# Altium PCB RF_PCB-v2.PcbDoc (part 2 of 2)
Units mm, origin at the board's own origin, x right, y up, seen from the top; angles counter-clockwise.
Board outline 99.5 x 79.5 mm, 2 copper layers (Top Layer, Bottom Layer); 69 components, 53 nets, 337 pads, 75 vias.
Unrouted connection lines stored in the file: 1.
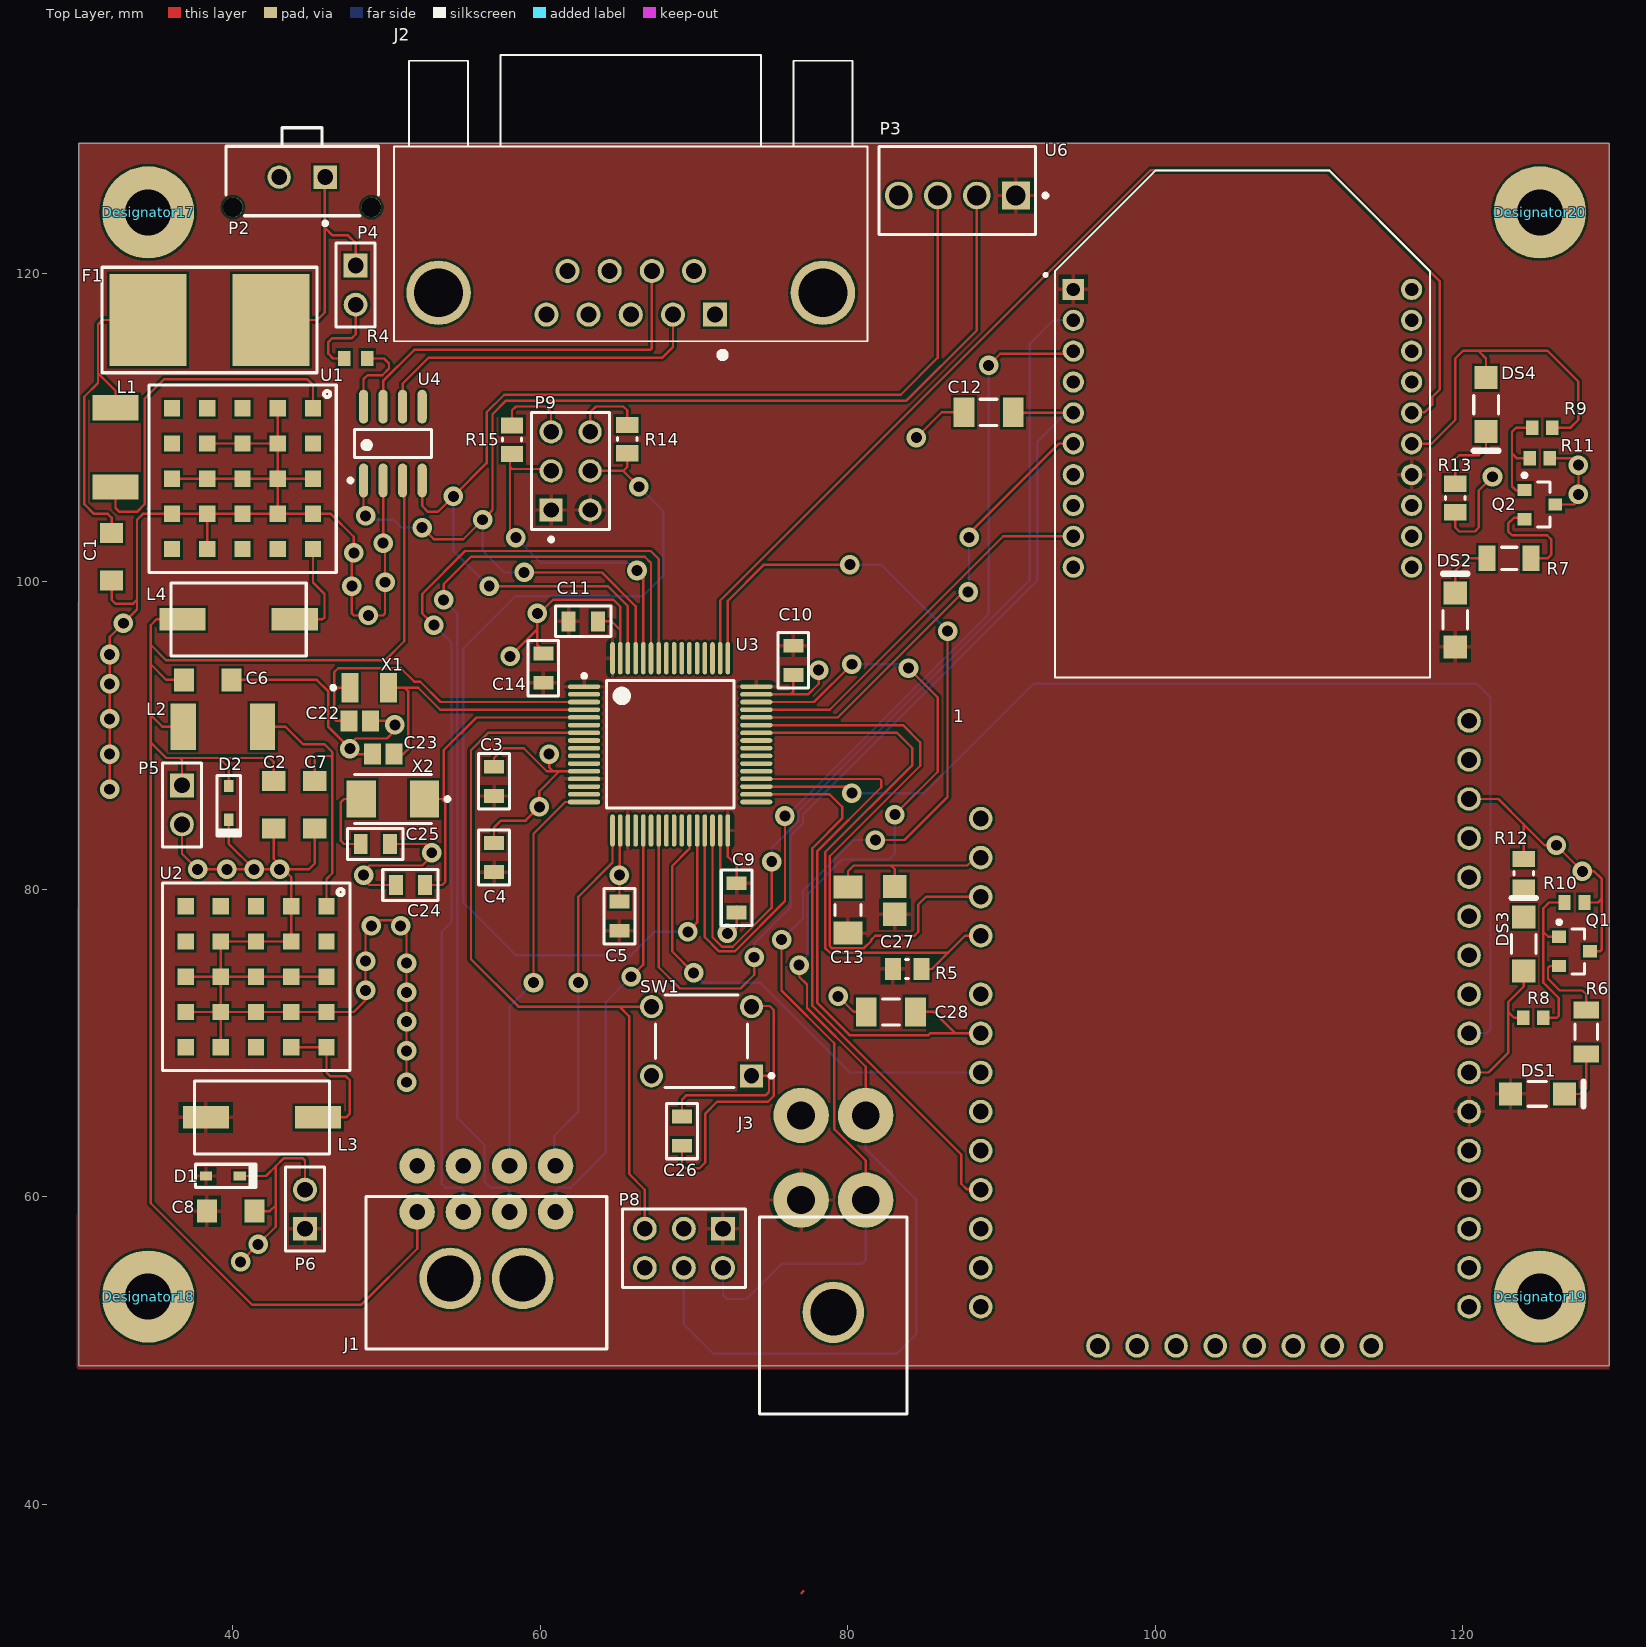
[diagram p0: Top Layer view]

## Part data (continued)
SW1: library part CMP-2000-05160-1, "6 mm Tact Switche, SPST, NO, -20 to 60 degC, 4-Pin SMT, RoHS, Tape and Reel", Manufacturer="ITT Cannon", Datasheet URL=https://datasheet.ciiva.com/29903/getdatasheetpartid-786341-29903846.pdf, Datasheet Version=Feb-14, Manufacturer URL=http://www.ittcannon.com/
U1: "1A DC/DC-CONVERTER INNOLINE SM", Manufacturer=Recom, Supplier Part Number 1=945-3250-1-ND, ComponentLink1Description=https://www.recom-power.com/pdf/Innoline/RPM-1.0.pdf?src-supplier=Digi-Key, ComponentLink1URL=https://www.recom-power.com/pdf/Innoline/RPM-1.0.pdf?src-supplier=Digi-Key, Manufacturer Part Number=RPM5.0-1.0, RoHS=No, Stock 1=175, Supplier 1=Digi-Key
U2: "1A DC/DC-CONVERTER INNOLINE SM", Manufacturer=Recom, Supplier Part Number 1=945-3249-1-ND, ComponentLink1Description=https://www.recom-power.com/pdf/Innoline/RPM-1.0.pdf?src-supplier=Digi-Key, ComponentLink1URL=https://www.recom-power.com/pdf/Innoline/RPM-1.0.pdf?src-supplier=Digi-Key, Manufacturer Part Number=RPM3.3-1.0, RoHS=No, Stock 1=319, Supplier 1=Digi-Key
U3: library part CMP-0237-00079-3, "ARM Cortex-M3 32-bit MCU, 256 KB Flash, 64 KB Internal RAM, 51 I/Os, 64-pin LQFP, -40 to 85 degC, Tray", I/Os (High Current)=51, Operating Frequency(F) (Processor speed) (MHz)=72, Supply Voltage(Vcc) min (V)=2, A/D Converter="2x12-bit (16 Channel)", ComponentLink1Description="Manufacturer URL", ComponentLink1URL=http://www.st.com/web/en/home.html, ComponentLink2Description=Datasheet, ComponentLink2URL=http://www.st.com/st-web-ui/static/active/en/resource/technical/document/datasheet/CD00220364.pdf, ComponentLink3Description="Package Specification", ComponentLink3URL=http://www.st.com/st-web-ui/static/active/en/resource/technical/document/datasheet/DM00037051.pdf, Core="ARM Cortex-M3", D/A Converter="2x12-bit (2 Channel)", DatasheetVersion="Rev. 6", FLASH Size (Prog) (kB)=256, Internal RAM Size (kB)=64, Mounting Technology="Surface Mount", PackageDescription="64-Pin Low Profile Quad Flat Package, 10 x 10 mm Body, 0.5 mm Pitch", PackageReference=LQFP64, PackageVersion="Rev. 4, 06/2013", Packing=Tray, PartNumber=STM32F107RCT6
U4: library part CMP-0186-00138-2, "High-Speed CAN Transceiver, 8-Pin SOIC, Industrial Temperature", Code_IPC=SOIC127P600-8, Code_JEDEC=MS-012, ComponentLink1Description="Manufacturer URL", ComponentLink1URL=http://www.microchip.com/, ComponentLink2Description=Datasheet, ComponentLink2URL=http://ww1.microchip.com/downloads/en/DeviceDoc/21667F.pdf, ComponentLink3Description="Package Specification", ComponentLink3URL=http://www.microchip.com/stellent/groups/techpub_sg/documents/packagingspec/en012702.pdf, DatasheetVersion="revF, Jul-2010", PackageDescription="8-Lead Plastic Small Outline (SN) - Narrow, 3.90mm Body [SOIC]", PackageReference=SOIC-SN8, PackageVersion="revBB, Aug-2009", RevisionNote="URLs added. DatasheetVersion updated."
U6: "802.15.4 Transceiver Module 2.4GHz Antenna Not Included, U.FL Through Hole", Package="Module Digi International", Availability=Unavailable, MF="Digi International", MP=XBP24CAUIT-001, Price=None, SnapEDA_Link=https://www.snapeda.com/parts/XBP24CAUIT-001/Digi%20International/view-part/1219456/?ref=snap
X1: library part CMP-0447-00001-2, "Crystal, 32.768 kHz, 12.5 pF, -40 to 85 degC, SMD Low Profile 3.2 x 1.5 x 0.9 mm, Tape and Reel", Equivalent Series Resistance (R1)="70 Kohm", Frequency="32.768 kHz", Frequency Tolerance @+25degC="+/- 20 ppm", Insulation Resistance (Min)="500 Mohm", Load Capacitance (CL)="12.5 pF", Manufacturer=Abracon, Operating Temperature="-40 to 85 degC", PartNumber=ABS07-32.768KHz-T, Q Value (Type)=30000, Shunt Capacitance (C0)="0.9 to 1.2 pF", ComponentLink1Description="Manufacturer URL", ComponentLink1URL=http://www.abracon.com/, ComponentLink2Description=Datasheet, ComponentLink2URL=http://www.abracon.com/Resonators/ABS07.pdf, ComponentLink3Description="Package Specification", ComponentLink3URL=http://www.abracon.com/Resonators/ABS07.pdf, DatasheetVersion=04.03.13, Drive Level (Type)="0.1 uW", Mounting Technology="Surface Mount", Operation Mode="Flexural Mode (Tuning Fork)", PackageDescription="2-Pin Hand Drawn, Body 3.2x1.5mm, Pitch 2.5mm", PackageReference=ABS07-2, Packing="Tape and Reel"
X2: library part CMP-2000-05033-1, "Miniature Ceramic Crystal, 8 MHz, -40 to 85 degC, 2-Pin SMD, RoHS, Tape and Reel", Case Height=1.3mm, Case Length=5mm, Case Width=3.2mm, Frequency Stability=30PPM, Load Capacitance=18pF, Manufacturer=ABRACON, Operating Temperature Range=-40Cto+85C, Package / Case=5mmx3.2mm, Package Description="2-Pin Surface Mount Device, Body 5 x 3.2 mm", Package Reference=ABM3-2, Tolerance=20PPM, Brand=ABRACON, Datasheet URL=http://www.farnell.com/datasheets/1754353.pdf, Datasheet Version=Sep-13, Dimensions=3.2mmWx5mmLx1.3mmH, ESR=140Ohms, Factory Pack Quantity=1000, Frequency=8MHz, Manufacturer URL=http://www.abracon.com/, Mounting Style=SMD/SMT, Package URL=http://www.abracon.com/Support/PackageDrawing/Resonators/ABM3.PDF, Packaging=Reel, Product Category=Crystals, RoHS=Details, Series=ABM3, Termination Style=SMD/SMT, Type=MiniatureCeramicCrystal
1: DeviceSetName=XBEE_SMD_ADAPTER, GateName_1=G$1, LibraryName=UBCSolar, Package=XBEE_SMD_ADAPTER, SymbolName_1=XBEE_SMD_ADAPTER

## Via types
v1: diameter 1.27, hole 0.711, Top Layer to Bottom Layer, 75 vias

## Nets (pads, with @x,y where several pads share a name; then routed paths per layer and width w, separated by ;. In a path a pad name is that pad's centre, name@x,y a point inside that pad or via, vN(x,y) a via of type N, cw(c..) or ccw(c..) an arc to the next point about the centre after c; other vN are vias at no path point)
5V: C2.2 C6.1 D2.2 J1.4 L2.1 L4.2 P5.1 U4.3 | length 110.4
  Top Layer w0.152: P5.1 36.703,88.392 36.576,88.519 ; L4.2 35.052,97.536 34.671,97.155 34.671,95.885 ; L2.1 35.433,90.551 34.671,91.313 ; C6.1 35.687,93.599 34.671,94.615 ; D2.2 39.751,87.884 39.116,88.519 ; C2.2 42.672,88.265 42.418,88.519 39.116,88.519 ; U4.3 51.156,106.464 51.156,96.114 49.911,94.869 35.687,94.869 34.671,95.885 ; J1.4 52,56.61 48.349,52.959 41.275,52.959 34.671,59.563 34.671,89.535 ; 34.671,89.535 35.687,88.519 36.576,88.519 ; 34.671,89.535 34.671,91.313 ; 34.671,91.313 34.671,94.615 ; 34.671,94.615 34.671,95.885 ; 36.576,88.519 39.116,88.519
12V: F1.1 P2.1 P4.1 | length 16.4
  Top Layer w0.152: F1.1 45.5,117 46,117.5 46,123 ; P2.1@46,126.293 46,123 ; P4.1 48,122 47.5,122.5 46.5,122.5 46,123
BOOT0: P9.3 R15.2 U3.60 | length 23.1
  Top Layer w0.152: R15.2 58.039,108.168 58.039,107.442 ; v1(58.42,102.845) 58.318,102.845 58.039,103.124 58.039,107.442 ; P9.3 60.579,107.315 58.166,107.315 58.039,107.442 ; v1(66.294,100.711) 66.703,100.302 U3.60
  Bottom Layer w0.152: v1(58.42,102.845) 60.046,101.219 65.707,101.219 66.215,100.711 v1(66.294,100.711)
BOOT1: P9.4 R14.2 U3.28 | length 66.3
  Top Layer w0.152: P9.4 65.405,107.188 ; R14.2 65.659,107.442 65.405,107.188 ; v1(66.421,106.156) 66.421,106.172 65.405,107.188 ; v1(69.596,77.216) 69.596,77.223 70.203,77.83 U3.28
  Bottom Layer w0.152: v1(66.421,106.156) 68.009,104.568 68.009,100.394 66.65,99.035 58.395,99.035 54.991,95.631 54.991,79.121 58.42,75.692 65.913,75.692 67.437,77.216 v1(69.596,77.216)
CANH: J2.7 U4.7 | length 25.1
  Top Layer w0.152: U4.7 49.784,113.03 51.816,115.062 67.17,115.062 67.259,115.151 J2.7
CANL: J2.2 U4.6 | length 22.2
  Top Layer w0.152: U4.6 51.054,112.852 52.756,114.554 67.945,114.554 68.631,115.24 J2.2
GND: 1.1 1.11 1.13 1.22 1.35 C1.2 C2.1 C3.2 C4.1 C5.1 C6.2 C7.1 C8.1 C9.1 C10.2 C11.1 C12.1 C14.1 C22.1 C23.1 C24.1 C25.1 C28.1 D1.1 D2.1 J1.8 J2.3 J2.6 J3.1 P2.2 P3.4 P4.2 P5.2 P6.2 P8.3 P9.5 P9.6 Q1.3 Q2.3 R4.1 R10.2 R11.2 R12.1 R13.1 R14.1 R15.1 SW1.2 U1.A3 U1.A4 U1.B1 U1.B2 U1.B3 U1.B4 U1.C2 U1.C3 U1.C4 U1.D2 U1.D3 U1.D4 U1.D5 U1.E3 U1.E4 U2.A3 U2.A4 U2.B1 U2.B2 U2.B3 U2.B4 U2.C2 U2.C3 U2.C4 U2.D2 U2.D3 U2.D4 U2.D5 U2.E3 U2.E4 U3.12 U3.18 U3.31 U3.47 U3.63 U4.2 U6.10 | length 300.3
  Top Layer w0.152: v1(32.004,86.487) 32.004,96.393 33.782,98.171 33.782,98.806 ; C1.2 32.131,98.806 32.385,98.552 33.528,98.552 33.782,98.806 ; U1.E3 U1.D3 U1.C3 U1.B3 ; P5.2 36.703,82.296 v1(37.719,81.28) v1(39.624,81.28) v1(41.402,81.28) ; U2.E4 U2.D4 ; U2.E3 U2.D3 ; U1.D5 U1.D4 ; U1.D2 U1.C2 U1.B2 ; U2.D5 U2.D4 ; D2.1 39.751,82.931 v1(41.402,81.28) ; C6.2 45.466,93.599 46.228,92.837 46.228,90.532 v1(47.625,89.135) ; D1.1 42.164,61.341 42.799,61.976 ; v1(40.513,55.753) v1(41.656,56.896) 42.799,58.039 42.799,59.436 ; C8.1 42.418,59.055 42.799,59.436 ; C2.1 42.672,81.963 43.053,81.582 v1(43.053,81.28) ; U1.B1 U1.B2 ; P6.2 44.704,62.357 44.577,62.484 43.307,62.484 42.799,61.976 ; U1.A3 U1.B3 ; C7.1 45.339,81.661 44.958,81.28 v1@43.307,81.28 ; U2.A3 U2.B3 U2.C3 U2.D3 ; R4.1 46.536,114.5 46.228,114.808 46.228,115.57 46.482,115.824 47.752,115.824 48,116.072 P4.2 ; C22.1 50.292,90.932 v1(50.546,90.678) 50.546,90.297 50.038,89.789 48.006,89.789 47.625,89.408 v1(47.625,89.135) ; C23.1 47.714,88.773 47.625,88.862 v1(47.625,89.135) ; U4.2 v1(49.784,102.489) 49.911,102.362 v1(49.911,99.949) 49.911,97.917 49.784,97.79 47.879,97.79 47.752,97.917 v1(47.752,99.695) 47.752,101.727 v1(47.879,101.854) 47.879,102.907 46.392,104.394 U1.A4 U1.B4 ; C25.1 52.578,82.931 52.947,82.562 52.947,82.157 52.324,81.534 48.895,81.534 48.514,81.153 v1(48.514,80.899) 48.514,80.645 48.895,80.264 C24.1 ; v1(51.308,67.437) v1(51.308,69.469) v1(51.308,71.374) v1(51.308,73.279) v1(51.308,75.184) 51.308,77.216 v1(50.927,77.597) 50.546,77.978 49.403,77.978 v1(49.022,77.597) 48.641,77.216 v1(48.641,75.311) v1(48.641,73.406) 48.641,72.771 47.875,72.005 U2.A4 U2.B4 U2.C4 U2.D4 ; C4.1 57,84 57.45,84.45 59.05,84.45 v1(59.944,85.344) 59.944,86.36 61.242,87.658 ; C3.2 57,88.519 57.635,89.154 58.928,89.154 60.424,87.658 60.833,87.658 ; v1(58.039,95.123) 59.817,96.901 ; R15.1 58.166,111.125 58.42,111.379 60.325,111.379 60.706,110.998 P9.5 ; v1(59.817,97.917) 59.817,96.901 ; v1@60.071,98.171 60.198,98.171 60.833,98.806 64.77,98.806 65.203,98.373 65.203,96.849 ; C14.1@60.198,95.48 59.817,95.861 59.817,96.901 ; v1(60.579,88.773) 60.579,87.912 60.833,87.658 ; U3.12 61.242,87.658 ; P9.6 63.246,110.998 63.627,111.379 65.405,111.379 65.659,111.125 R14.1 ; C11.1@63.627,97.409 64.643,97.409 65.203,96.849 ; C5.1 v1(65.151,80.899) 65.177,80.925 65.177,83.782 U3.18 ; U3.63 65.203,96.849 ; U3.31 71.703,77.395 72.009,77.089 72.135,77.089 v1(72.167,77.121) ; v1@72.2,77.089 72.39,77.089 72.771,77.47 C9.1@72.771,78.879 ; U3.47 76.275,92.658 ; C10.2@76.454,93.496 76.454,92.837 76.275,92.658 ; v1(78.105,94.234) 78.105,93.345 77.418,92.658 76.275,92.658 ; v1(79.375,73.025) 80.391,72.009 C28.1 ; v1(84.455,109.347) 86.106,110.998 C12.1 ; R13.1 119.5,103.512 119.761,103.251 120.777,103.251 121.031,103.505 121.031,105.918 v1(121.92,106.807) ; 1.35 122.301,85.852 123.952,84.201 ; R12.1 123.952,84.201 ; R11.2 127.077,108 v1(127.508,107.569) v1(127.508,105.664) 127.508,105.283 127.225,105 Q2.3 ; R10.2 128.778,79.121 129.032,79.375 ; Q1.3 128.905,75.946 129.032,76.073 129.032,79.375 ; 33.782,98.806 33.782,104.013 34.163,104.394 U1.E4 U1.D4 ; U1.D4 U1.C4 U1.B4 ; U2.D4 U2.D3 ; U2.D3 U2.D2 U2.C2 U2.B2 U2.B1 43.815,80.772 v1@43.307,81.28 ; v1(41.402,81.28) v1(43.053,81.28) ; 42.799,59.436 42.799,61.976 ; U1.B4 U1.B3 ; U1.B3 U1.B2 ; v1(43.053,81.28) v1@43.307,81.28 ; 60.833,87.658 61.242,87.658 ; 123.952,84.201 125.307,82.846 v1(126.069,82.846) v1(127.762,81.153) 128.524,81.153 129.032,80.645 129.032,79.375
  other v1: 52.947,82.359 32.004,88.773 32.004,91.059 32.004,93.345 32.004,95.25 32.893,97.282 48.831,97.79
Net1_2: 1.2 C13.1 C27.1 | length 11.5
  Top Layer w0.152: C13.1 80.01,81.153 80.391,81.534 82.804,81.534 ; C27.1 83.058,81.28 82.804,81.534 ; 1.2 88.273,82.042 87.765,81.534 82.804,81.534
Net1_3: 1.3 U3.43 | length 39.1
  Top Layer w0.152: U3.43 83.586,90.658 84.709,89.535 84.709,88.011 78.831,82.133 78.831,76.292 78.965,76.158 81.055,76.158 81.534,76.638 81.534,76.708 81.788,76.962 84.328,76.962 84.582,77.216 84.582,78.994 85.09,79.502 1.3
Net1_4: 1.4 R5.1 U3.42 | length 38.8
  Top Layer w0.152: U3.42 83.197,90.158 84.201,89.154 84.201,88.062 78.527,82.387 78.527,76.166 78.839,75.854 86.522,75.854 86.55,75.882 ; R5.1 85.471,74.803 86.55,75.882 ; 1.4 87.63,76.962 86.55,75.882
Net1_6: 1.6 C28.2 U3.36 | length 39.1
  Top Layer w0.152: U3.36 82.08,87.158 82.169,87.069 82.169,86.614 78.003,82.448 78.003,72.619 80.137,70.485 85.217,70.485 85.344,70.612 86.995,70.612 ; C28.2 85.598,72.009 86.995,70.612 ; 1.6 86.995,70.612
Net1_7: 1.7 U3.27 | length 31.7
  Top Layer w0.152: U3.27 69.703,82.619 69.614,82.529 68.58,81.496 68.58,75.946 v1(69.977,74.549)
  Bottom Layer w0.152: v1(69.977,74.549) 70.612,73.914 74.295,73.914 80.137,68.072 1.7
Net1_10: 1.10 U3.34 | length 36.7
  Top Layer w0.152: U3.34 78.815,86.158 79.629,85.344 79.629,84.582 77.699,82.652 77.699,72.415 87.376,62.738 87.376,60.833 87.742,60.467 88.631,60.467 1.10
Net1_28: 1.28 DS3.1 R8.1 | length 10
  Top Layer w0.152: 1.28 121.666,68.072 122.936,69.342 122.936,72.009 ; R8.1 123.317,71.628 122.936,72.009 ; DS3.1 123.952,73.66 122.936,72.644 122.936,72.009
Net1_29: 1.29 U3.35 | length 74.3
  Top Layer w0.152: U3.35 79.839,86.658 v1(80.264,86.233)
  Bottom Layer w0.152: v1(80.264,86.233) 84.963,86.233 92.075,93.345 120.904,93.345 121.793,92.456 121.793,70.866 121.539,70.612 1.29
NetC1_1: C1.1 F1.2 L1.1 | length 21.3
  Top Layer w0.152: C1.1 32.131,104.14 31.877,104.394 30.988,104.394 30.353,105.029 30.353,112.014 31.242,112.903 31.242,113.538 ; L1.1 32.385,112.395 31.242,113.538 ; F1.2 31.529,117 31.242,116.713 31.242,113.538
NetC7_2: C7.2 L2.2 U2.A1 | length 18.2
  Top Layer w0.152: L2.2 43.434,90.551 44.577,89.408 45.974,89.408 46.482,88.9 46.482,88.519 ; C7.2 45.339,88.557 45.428,88.646 46.355,88.646 46.482,88.519 ; U2.A1 46.105,80.649 46.482,81.026 46.482,88.519
NetC12_2: C12.2 U3.23 U6.5 | length 65.5
  Top Layer w0.152: U3.23 67.703,74.918 69.088,73.533 73.025,73.533 73.914,74.422 v1(73.914,75.565) ; C12.2@90.83,111.074 C12.2 90.792,110.96 U6.5
  Bottom Layer w0.152: v1(73.914,75.565) 73.914,76.454 76.276,78.816 76.276,83.465 77.089,84.278 77.089,84.836 92.329,100.076 92.329,109.093 93.961,110.725 94.431,110.725 U6.5
NetC22_2: C22.2 U3.3 X1.1 | length 22.5
  Top Layer w0.152: C22.2 46.736,90.932 46.609,91.059 46.609,92.837 ; X1.1 46.863,93.091 46.609,92.837 ; U3.3 53.511,92.158 52.197,93.472 51.816,93.472 50.927,94.361 46.863,94.361 46.609,94.107 46.609,92.837
NetC23_2: C23.2 U3.4 X1.2 | length 18.5
  Top Layer w0.152: X1.2 51.181,93.091 ; C23.2 51.092,88.773 51.41,89.091 51.41,92.862 51.181,93.091 ; U3.4 53.503,91.658 52.07,93.091 51.181,93.091
NetC24_2: C24.2 U3.5 X2.1 | length 21.3
  Top Layer w0.152: X2.1 53.594,85.852 53.721,85.725 ; C24.2 53.632,80.264 53.823,80.455 53.823,85.623 53.721,85.725 ; U3.5 55.852,91.158 53.721,89.027 53.721,85.725
NetC25_2: C25.2 X2.2 | length 5.3
  Top Layer w0.152: C25.2 47.244,82.931 47.041,83.134 47.041,85.649 47.244,85.852 X2.2
NetC26_1: C26.1 SW1.3 | length 18.2
  Top Layer w0.152: C26.1 69.215,62.103 69.469,61.849 70.358,61.849 70.739,62.23 70.739,65.405 71.501,66.167 74.803,66.167 75.184,66.548 75.184,72.136 74.93,72.39 73.771,72.39 SW1.3
NetC26_2: C26.2 SW1.1 | length 9.1
  Top Layer w0.152: C26.2 69.215,66.294 69.52,66.599 74.676,66.599 74.879,66.802 74.879,67.691 74.716,67.854 SW1.1
NetDS1_2: DS1.2 R6.2 | length 3.8
  Top Layer w0.152: DS1.2 127.635,66.675 128.016,67.056 R6.2
NetDS2_2: DS2.2 R7.2 | length 3.9
  Top Layer w0.152: DS2.2 119.5,100.704 120.296,101.5 R7.2
NetDS3_2: DS3.2 R12.2
NetDS4_1: DS4.1 R9.1 U6.15 | length 22.9
  Top Layer w0.152: U6.15 117.953,108.953 119.5,110.5 119.5,114.5 120,115 121,115 ; DS4.1 121.5,114.5 121,115 ; R9.1 127,110 127.5,110.5 127.5,113 125.5,115 121,115
NetDS4_2: DS4.2 R13.2 | length 5
  Top Layer w0.152: R13.2 119.5,107.943 119.761,108.204 121.031,108.204 121.5,108.673 DS4.2
NetL1_2: L1.2 U1.A1 | length 23.6
  Top Layer w0.152: L1.2 32.385,104.775 32.639,104.521 33.782,104.521 34.29,105.029 34.29,111.887 35.56,113.157 44.831,113.157 45.224,112.764 U1.A1
NetL3_1: L3.1 U2.A5 U2.B5 | length 10
  Top Layer w0.152: U2.B5 U2.A5 46.105,68.068 46.355,67.818 47.371,67.818 47.625,67.564 47.625,65.405 47.371,65.151 L3.1
NetL4_1: L4.1 U1.A5 | length 6.7
  Top Layer w0.152: L4.1 45.847,97.536 45.974,97.663 45.974,99.187 45.224,99.937 U1.A5
NetQ1_1: Q1.1 R8.2 R10.1 | length 11.2
  Top Layer w0.152: R8.2 126.111,71.628 126.238,71.755 126.238,72.898 125.222,73.914 125.222,77.216 ; Q1.1 125.542,76.896 125.222,77.216 ; R10.1 125.603,79.121 125.222,78.74 125.222,77.216
NetQ1_2: Q1.2 R6.1 | length 5.4
  Top Layer w0.152: Q1.2 125.664,74.996 125.527,74.859 125.527,74.168 126.289,73.406 127.762,73.406 128.016,73.152 R6.1
NetQ2_1: Q2.1 R9.2 R11.1 | length 7.2
  Top Layer w0.152: Q2.1 123.968,105.918 123.444,105.918 123.19,106.172 123.19,108.331 ; R11.1 123.521,108 123.19,108.331 ; R9.2 123.462,110 123.19,109.728 123.19,108.331
NetQ2_2: Q2.2 R7.1 | length 7.2
  Top Layer w0.152: Q2.2 123.91,104.14 123.317,104.14 122.936,103.759 122.936,103.251 123.19,102.997 125.476,102.997 125.73,102.743 125.73,101.727 125.503,101.5 R7.1
NetR4_2: R4.2 U4.8 | length 5.6
  Top Layer w0.152: U4.8 48.514,113.157 48.768,113.411 49.734,113.411 50.165,113.842 50.165,114.173 49.838,114.5 R4.2
NetU3_29: U3.29 U6.3 | length 60.2
  Top Layer w0.152: U3.29 70.703,76.871 71.628,75.946 72.644,75.946 75.921,79.223 75.921,84.734 v1(75.907,84.748) ; v1(89.154,114.046) 89.916,114.808 94.501,114.808 U6.3
  Bottom Layer w0.152: v1(75.907,84.748) 76.034,84.748 89.154,97.868 v1(89.154,114.046)
NetU3_30: U3.30 U6.2 | length 59.2
  Top Layer w0.152: U3.30 71.203,76.864 71.816,76.251 72.518,76.251 75.057,78.79 v1(75.057,81.788)
  Bottom Layer w0.152: v1(75.057,81.788) 75.057,82.677 76.77,84.39 76.77,85.025 91.821,100.076 91.821,115.443 93.358,116.98 U6.2
NetU3_44: U3.44 U6.6 | length 30.2
  Top Layer w0.152: U3.44 79.347,91.158 87.503,99.314 v1(87.82,99.314) ; v1(87.884,102.87) 87.884,103.124 93.726,108.966 94.653,108.966 U6.6
  Bottom Layer w0.152: v1(87.82,99.314) 87.884,99.377 v1(87.884,102.87)
NetU3_45: U3.45 U6.9 | length 25.3
  Top Layer w0.152: U3.45 78.831,91.658 90.106,102.933 U6.9
NetU3_50: U3.50 U6.16 | length 74.9
  Top Layer w0.152: U3.50 71.703,98.754 99.695,126.746 111.252,126.746 118.5,119.498 118.5,112.5 118,112 118,111.5 117.491,110.991 116.693,110.991 U6.16
NRST: P8.5 SW1.4 U3.7 | length 49.7
  Top Layer w0.152: U3.7 60.083,90.158 60.071,90.17 56.642,90.17 55.499,89.027 55.499,75.438 58.583,72.354 65.151,72.354 ; P8.5 66.802,60.452 65.786,61.468 65.786,71.719 65.151,72.354 ; SW1.4 65.151,72.354
  Bottom Layer w0.152: P8.5 P8.5@66.915,58.025
PA2: J1.6 U3.16 | length 26.6
  Top Layer w0.152: v1(59.563,73.914) 59.563,83.588 61.633,85.658 U3.16
  Bottom Layer w0.152: J1.6@58,61.389 J1.6@58.127,61.516 ; J1.6 58,72.351 v1(59.563,73.914)
PA3: J1.5 U3.17 | length 23.4
  Top Layer w0.152: v1(62.484,73.914) 62.484,79.502 64.703,81.721 U3.17
  Bottom Layer w0.152: J1.5 60.912,62.088 60.912,63.96 62.484,65.532 v1(62.484,73.914)
PA5: J1.1 U3.21 | length 27.6
  Top Layer w0.152: v1(65.913,74.295) 66.703,75.085 U3.21
  Bottom Layer w0.152: J1.1 61.014,59.014 61.014,60.379 61.214,60.579 61.976,60.579 62.484,61.087 64.262,62.865 64.262,72.644 v1(65.913,74.295)
PB6: J1.3 U3.58 | length 65.6
  Top Layer w0.152: v1(53.086,97.155) 52.324,97.917 52.324,99.187 55.118,101.981 67.183,101.981 67.703,101.461 U3.58
  Bottom Layer w0.152: v1(53.086,97.155) 54.229,96.012 54.229,77.851 53.594,77.216 53.594,60.833 53.848,60.579 54.864,60.579 55,60.443 J1.3
PB7: J1.2 U3.59 | length 63.8
  Top Layer w0.152: v1(53.721,98.806) 53.721,99.822 55.499,101.6 66.802,101.6 67.203,101.199 U3.59
  Bottom Layer w0.152: v1(53.721,98.806) 54.61,97.917 54.61,65.103 56.379,63.335 56.379,60.969 56.769,60.579 57.785,60.579 57.985,60.379 57.985,59.015 J1.2
PB8: P3.2 U3.61 U4.1 | length 77.6
  Top Layer w0.152: U4.1 48.514,104.394 v1(48.641,104.267) ; v1(52.324,103.505) 53.086,102.743 54.991,102.743 v1(56.261,104.013) 56.896,104.648 56.896,110.871 57.785,111.76 83.82,111.76 88.392,116.332 P3.2 ; v1(58.949,100.584) 64.008,100.584 66.203,98.389 U3.61
  Bottom Layer w0.152: v1(48.641,104.267) 48.855,104.053 49.249,104.053 49.289,104.013 50.458,104.013 50.966,103.505 v1(52.324,103.505) ; v1(56.261,104.013) 56.261,101.981 57.658,100.584 v1(58.949,100.584)
PB9: P3.3 U3.62 U4.4 | length 71.7
  Top Layer w0.152: U4.4 52.324,104.902 52.705,104.521 53.34,104.521 v1(54.356,105.537) 56.515,107.696 56.515,110.998 57.658,112.141 83.439,112.141 85.852,114.554 P3.3 ; v1(56.685,99.695) 64.389,99.695 65.703,98.381 U3.62
  Bottom Layer w0.152: v1(54.356,105.537) 54.356,101.981 56.642,99.695 v1(56.685,99.695)
SWCLK: J3.4 P8.2 U3.49 | length 82.6
  Top Layer w0.152: U3.49 72.203,98.746 74.549,101.092 v1(80.137,101.092) ; v1(75.692,76.708) 75.692,73.406 79.121,69.977 79.121,64.389 81.162,62.348 J3.4 ; v1(81.788,83.185) 83.693,83.185 86.487,85.979 v1(86.487,96.774)
  Bottom Layer w0.152: P8.2 71.882,53.594 72.136,53.34 73.406,53.34 75.692,55.626 80.899,55.626 81.162,55.889 81.162,59.76 81.153,59.769 J3.4 ; v1(75.692,76.708) 77.089,78.105 77.089,79.883 80.391,83.185 v1(81.788,83.185) ; v1(80.137,101.092) 82.169,101.092 v1(86.487,96.774)
SWDIO: J3.2 P8.4 U3.46 | length 83.9
  Top Layer w0.152: U3.46 77.807,92.158 v1(80.264,94.615) ; v1(76.835,75.057) 76.835,74.295 77.343,73.787 77.343,72.263 81.162,68.444 J3.2 ; v1(83.058,84.836) 85.852,87.63 85.852,92.456 v1(83.947,94.361)
  Bottom Layer w0.152: P8.4 69.342,51.689 71.247,49.784 83.185,49.784 84.455,51.054 84.455,59.817 81.153,63.119 81.153,65.269 J3.2 ; v1(76.835,75.057) 76.835,75.161 77.394,75.72 77.394,79.68 79.629,81.915 82.677,81.915 83.058,82.296 v1(83.058,84.836) ; v1(80.264,94.615) 83.693,94.615 v1(83.947,94.361)
V3.3: 1.27 C3.1 C4.2 C5.2 C8.2 C9.2 C10.1 C11.2 C13.2 C14.2 C27.2 D1.2 DS1.1 DS2.1 J3.3 L3.2 P3.1 P6.1 P8.1 P9.1 P9.2 R5.2 U3.1 U3.13 U3.19 U3.32 U3.48 U3.64 U6.1 U6.14 | length 3.7
  Top Layer w0.152: U3.32 72.203,82.102 72.771,81.534 C9.2
pads on no net: 1.5 1.8 1.9 1.12 1.14 1.15 1.16 1.17 1.18 1.19 1.20 1.21 1.23 1.24 1.25 1.26 1.30 1.31 1.32 1.33 1.34 1.36 1.37 Designator17.1 Designator18.1 Designator19.1 Designator20.1 J1. J1.7 J2.1 J2.4 J2.5 J2.8 J2.9 J2.None J3. P2.MH1 P2.MH2 P8.6 U1.A2 U1.B5 U1.C1 U1.C5 U1.D1 U1.E1 U1.E2 U1.E5 U2.A2 U2.C1 U2.C5 U2.D1 U2.E1 U2.E2 U2.E5 U3.2 U3.6 U3.8 U3.9 U3.10 U3.11 U3.14 U3.15 U3.20 U3.22 U3.24 U3.25 U3.26 U3.33 U3.37 U3.38 U3.39 U3.40 U3.41 U3.51 U3.52 U3.53 U3.54 U3.55 U3.56 U3.57 U4.5 U6.4 U6.7 U6.8 U6.11 U6.12 U6.13 U6.17 U6.18 U6.19 U6.20
copper on no net: | length 0.2
  Top Layer w0.152: 76.986,34.218 77.104,34.336

## Polygon pours and split planes (outlines as drawn)
V3.3 on Top Layer "V3.3_L01_P000" (solid, pour order 0): 30.002,128.5 129.5,128.5 129.5,48.768 29.873,48.768
GND on Bottom Layer "GND_L02_P001" (solid, pour order 1): 30,128.5 129.5,128.5 129.5,48.641 30,48.641